# Altium PCB Music Box Shield.PcbDoc
Units mil, origin at the board's own origin, x right, y up, seen from the top; angles counter-clockwise.
Board outline 3050 x 2100 mil, 2 copper layers (Top Layer, Bottom Layer); 12 components, 9 nets, 60 pads, 1 vias.
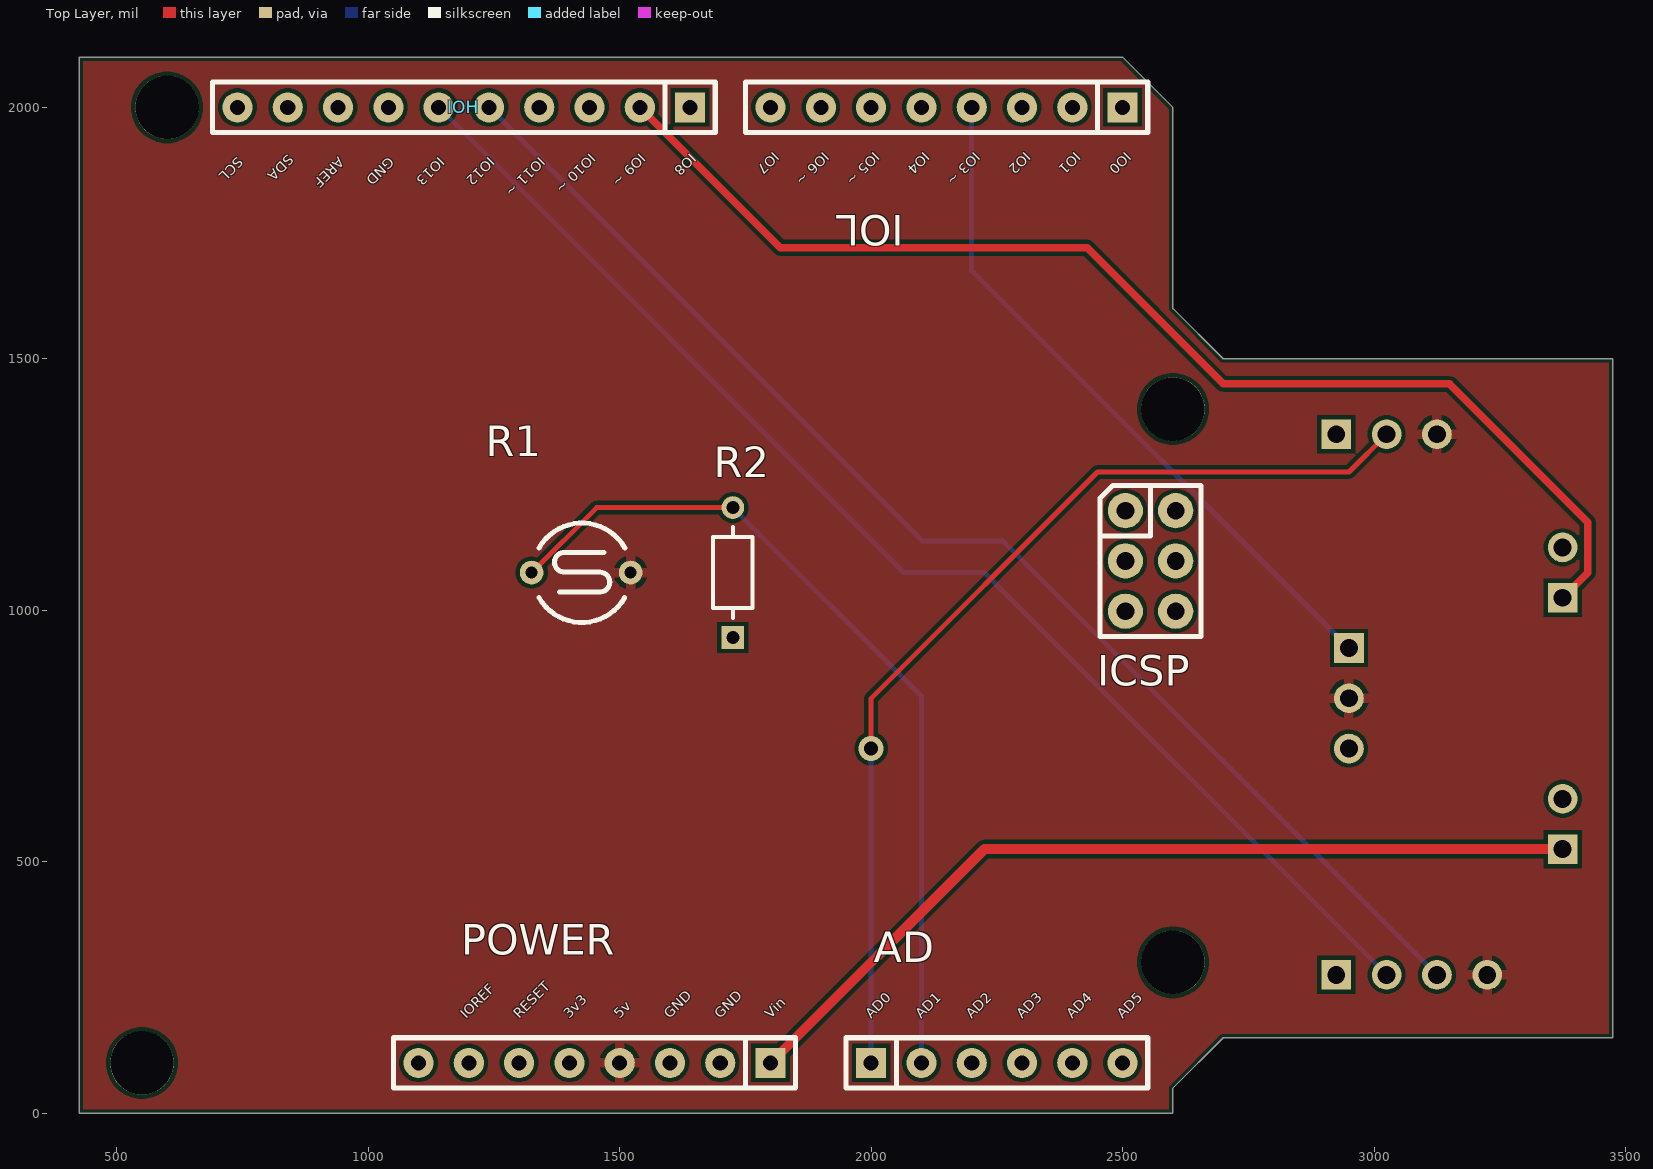
[diagram p0: Top Layer view]
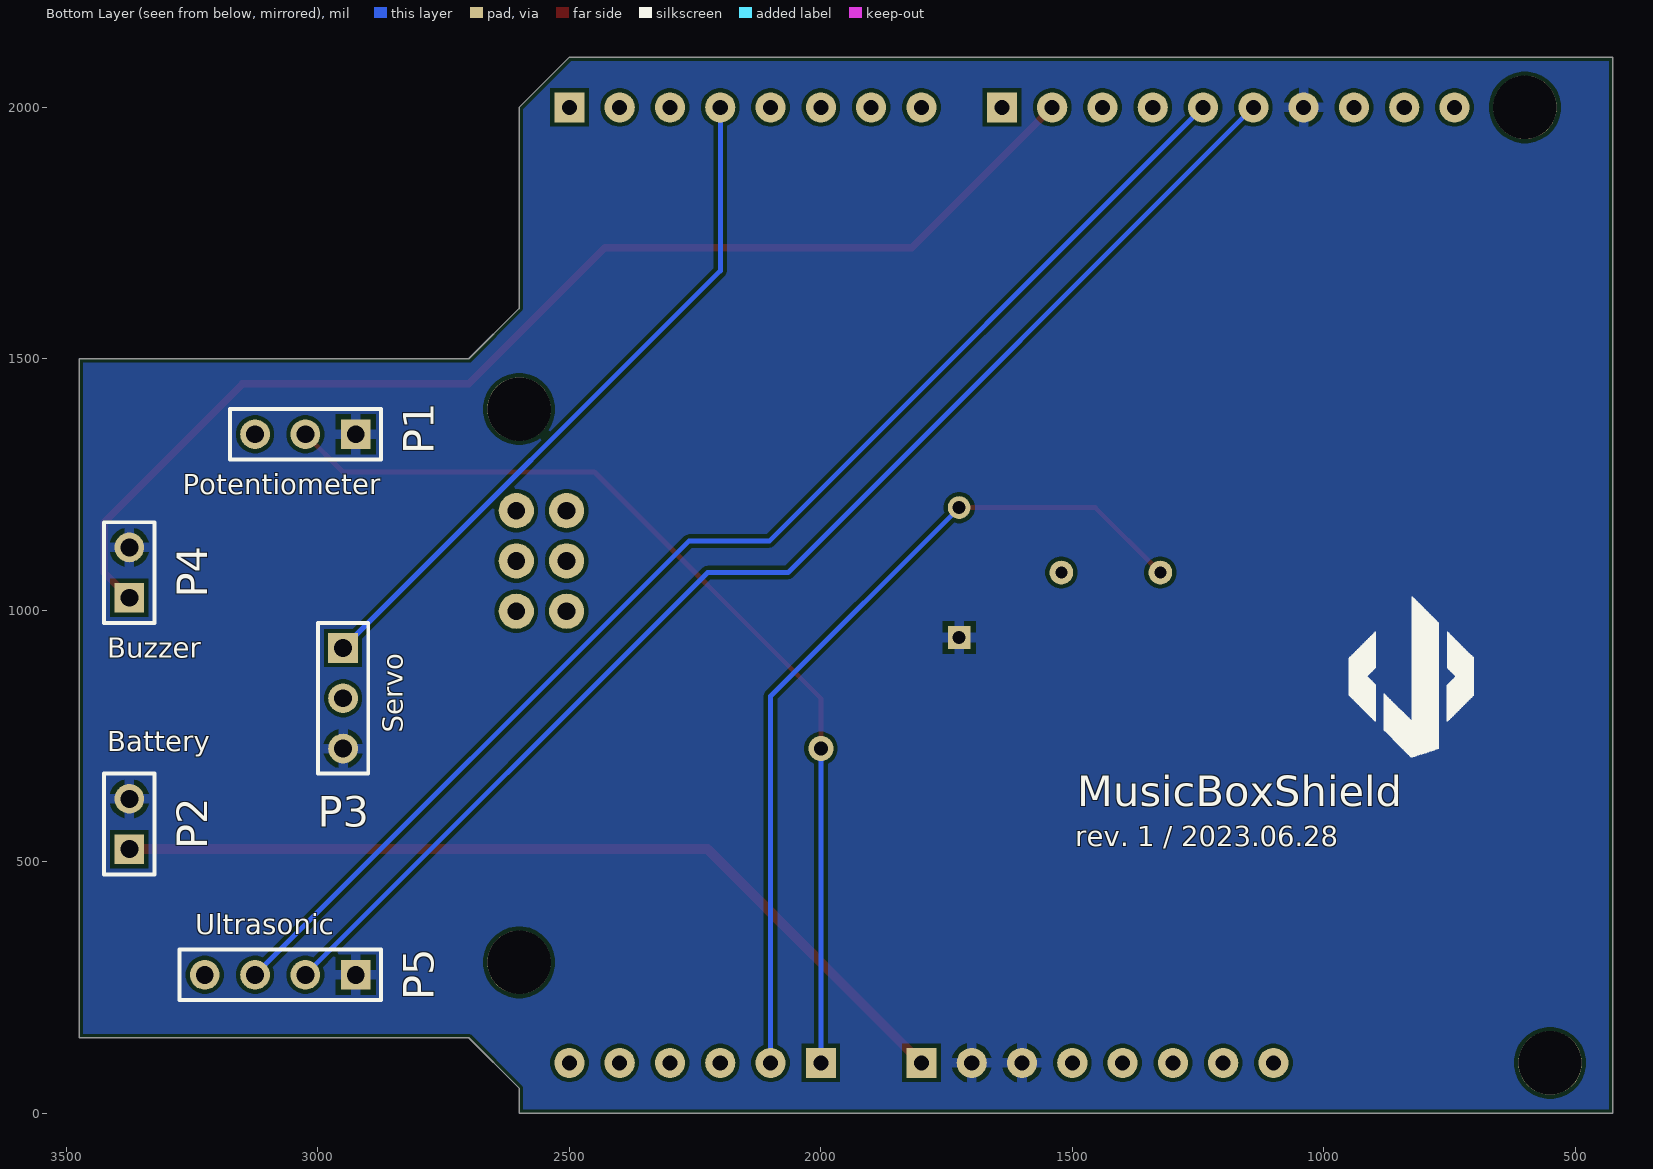
[diagram p1: Bottom Layer view, seen from below]
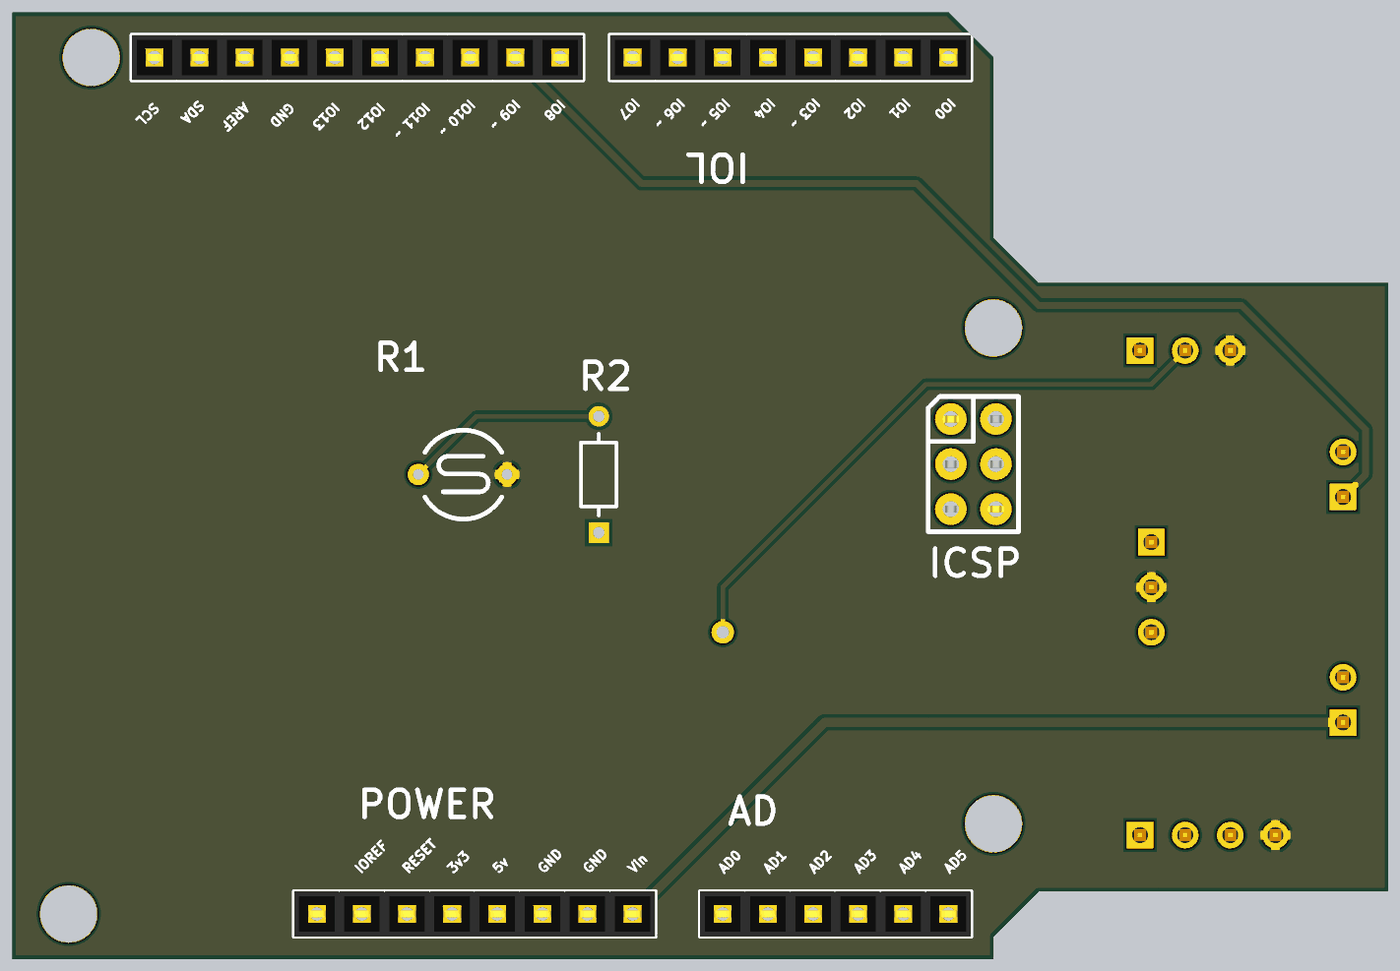
[diagram p2: 3D render of the assembled board from above, using the file's embedded part models]
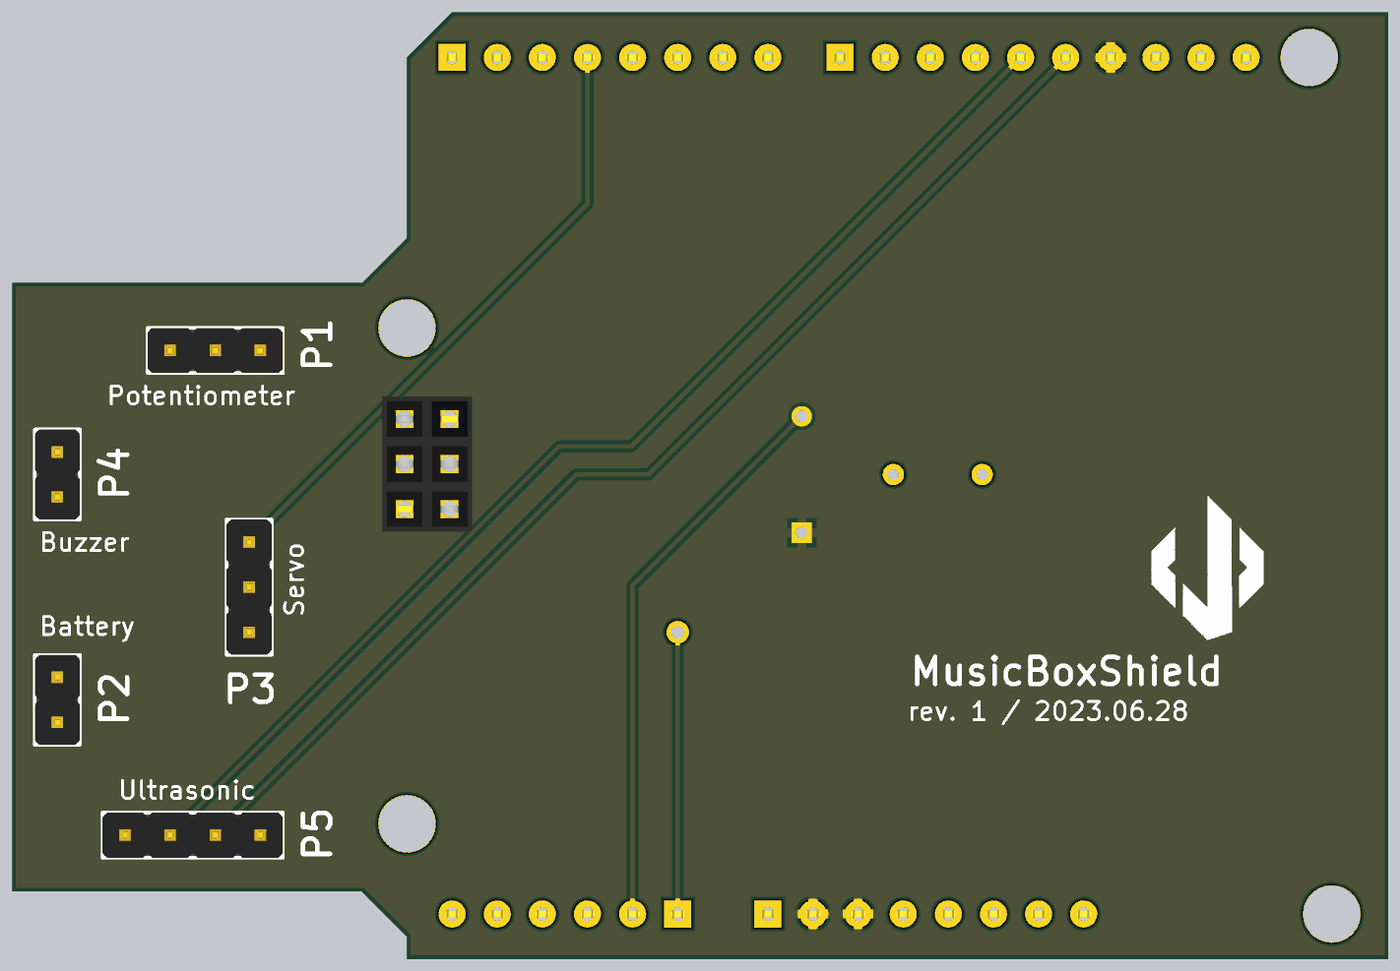
[diagram p3: 3D render of the assembled board from below, using the file's embedded part models]

## Layer stack, top to bottom
Top Solder: solder mask 0.4, Solder Resist, Dk 3.5
Top Layer: signal copper 1.4
Dielectric1: dielectric 12.6, FR-4, Dk 4.8
Bottom Layer: signal copper 1.4
Bottom Solder: solder mask 0.4, Solder Resist, Dk 3.5

## Board outline
2700,1500 3475,1500 3475,150 2700,150 2600,50 2600,0 425,0 425,2100 2500,2100 2600,2000 2600,1600

## Design rules (kind name [scope] priority, off if disabled: settings)
BoardOutlineClearance [All] p1: gap=7.87 ignorepadtopadclearanceinfootprint=FALSE except(15.75: Arc-SplitBarrior Arc-SplitContinuation Track-SplitBarrior Track-SplitContinuation SMDPad-SplitBarrior SMDPad-SplitContinuation THPad-SplitBarrior THPad-SplitContinuation Via-SplitBarrior Via-SplitContinuation Fill-SplitBarrior Fill-SplitContinuation Poly-SplitBarrior Poly-SplitContinuation Region-SplitBarrior Region-SplitContinuation Text-SplitBarrior Text-SplitContinuation)
Clearance "Clearance Bottom Layer" [OnLayer('Bottom Layer')] p1: gap=8 ignorepadtopadclearanceinfootprint=TRUE except(10: Arc-Text Track-Text SMDPad-Text THPad-Text Via-Text Fill-Text Poly-Text Region-Text Text-Text)
Clearance "Clearance Top Layer" [OnLayer('Top Layer')] p2: gap=8 ignorepadtopadclearanceinfootprint=TRUE except(10: Arc-Text Track-Text SMDPad-Text THPad-Text Via-Text Fill-Text Poly-Text Region-Text Text-Text)
Clearance [All] p3: gap=7.87 ignorepadtopadclearanceinfootprint=FALSE except(3.5: Arc-Arc Arc-Track Arc-SMDPad Track-Track Track-SMDPad SMDPad-SMDPad; 5: Arc-Via Track-Via SMDPad-Via THPad-Via Via-Via; 10: Arc-Text Track-Text SMDPad-Text THPad-Text Via-Text Fill-Text Poly-Text Region-Text Text-Text)
HoleSize [All] p1: absolutevalues=TRUE maxlimit=248.03 minlimit=7.87 maxpercent=80.000 minpercent=20.000
MinimumAnnularRing [All] p1: minimumring=3
MinimumSolderMaskSliver [All] p1: minsoldermaskwidth=3.94
PolygonConnect PolygonConnect_1 [All] p1: thpad.connectstyle=Relief thpad.reliefconductorwidth=20 thpad.reliefentries=4 thpad.polygonreliefangle="90 Angle" thpad.airgapwidth=10 smdpad.connectstyle=Relief smdpad.reliefconductorwidth=20 smdpad.reliefentries=4 smdpad.polygonreliefangle="90 Angle" smdpad.airgapwidth=10 via.connectstyle=Direct via.reliefconductorwidth=20 via.reliefentries=4 via.polygonreliefangle="90 Angle" via.airgapwidth=10
RoutingCorners [All] p1: cornerstyle=Round minsetback=100 maxsetback=100
RoutingVias [All] p1: holewidth=19.68 width=39.37 viastyle="Through Hole" minholewidth=7.87 minwidth=17.72 maxholewidth=39.37 maxwidth=78.74
SilkToSilkClearance [All] p1: silktosilkclearance=3.94
SilkToSolderMaskClearance [IsPad] p1: minsilkscreentomaskgap=3.94 clearancetoexposedcopper=TRUE
SolderMaskExpansion [All] p1: expansion=4 istentingtop=FALSE
Width [All] p1: maxlimit=100 minlimit=3.5 preferedwidth=15
25 further rules are at their usual default settings.

## Components (designator, comment, footprint, x,y, rotation, side; value= is the part's Value field where it differs from the comment)
AD "AD" "Header 6x1 8.5mm" 2000,100 r0 top locked
ICSP "ICSP" ICSP 2505.51,1198.03 r0 top locked
IOH "IOH" "Header 10x1 8.5mm" 1640,2000 r180 top locked
IOL "IOL" "Header 8x1 8.5mm" 2500,2000 r180 top locked
P1 "Potentiometer" HDR1X3 2925,1350 r0 bottom
P2 "9V Battery" HDR1X2 3375,525 r90 bottom
P3 "Servo" HDR1X3 2950,925 r270 bottom
P4 "Buzzer" HDR1X2 3375,1025 r90 bottom
P5 "HC-SR04" HDR1X4 2925,275 r0 bottom
POWER "POWER_UNO" "Header 8x1 8.5mm" 1800,100 r180 top locked
R1 "Photoresistor" "5MM PHOTORESISTOR" 1325,1075 r0 top
R2 "CF18JT2K20" FP-CF18-MFG 1725,1075 r90 top value=2.2kΩ

## Footprints (in the part's own frame and the unit in brackets; to place one, negate y for a bottom-side part, rotate by r counter-clockwise, add the part's x,y. Pads: shape width x height; smd on the part's side, far side on the other; paste and mask are expansions set on the pad)
"5MM PHOTORESISTOR" [mm]
  round 1.2 hole 0.6: 1(0,0) 2(5,0)
  silkscreen extent 0.37,-2.52 4.71,2.5, body extent 0.23,-1.89 4.78,1.91, height 4.1
FP-CF18-MFG [mm]
  rect 1.15x1.15 hole 0.65 paste-1000 mask+0: 1(-3.28,0)
  round 1.15 hole 0.65 paste-1000 mask+0: 2(3.28,0)
  silkscreen extent -2.3,-1 2.3,1
HDR1X2 [mm] "Connector; Header; 2 Position"
  rect 1.5x1.5 hole 0.9: 1(0,0)
  round 1.5 hole 0.9: 2(2.54,0)
  silkscreen extent -1.27,-1.27 3.81,1.27, body extent -1.27,-1.27 3.81,1.27, height 8.89
HDR1X3 [mm] "Connector; Header; 3 Position"
  rect 1.5x1.5 hole 0.9: 1(0,0)
  round 1.5 hole 0.9: 2(2.54,0) 3(5.08,0)
  silkscreen extent -1.27,-1.27 6.35,1.27, body extent -1.27,-1.27 6.35,1.27, height 8.89
HDR1X4 [mm] "Connector; Header; 4 Position"
  rect 1.5x1.5 hole 0.9: 1(0,0)
  round 1.5 hole 0.9: 2(2.54,0) 3(5.08,0) 4(7.62,0)
  silkscreen extent -1.27,-1.27 8.89,1.27, body extent -1.27,-1.27 8.89,1.27, height 8.89
"Header 6x1 8.5mm" [mil] "Stackable 6 pin header"
  rect 60x60 hole 30: 1(0,0)
  round 60 hole 30: 2(100,0) 3(200,0) 4(300,0) 5(400,0) 6(500,0)
  silkscreen extent -50,-50 550,50, body extent -50,-50 550,50, height 335
"Header 8x1 8.5mm" [mil] "Stackable 8 pin header"
  rect 60x60 hole 30: 1(0,0)
  round 60 hole 30: 2(100,0) 3(200,0) 4(300,0) 5(400,0) 6(500,0) 7(600,0) 8(700,0)
  silkscreen extent -50,-50 750,50, body extent -50,-50 750,50, height 335
"Header 10x1 8.5mm" [mil] "Stackable 10 pin header"
  rect 60x60 hole 30: 1(0,0)
  round 60 hole 30: 2(100,0) 3(200,0) 4(300,0) 5(400,0) 6(500,0) 7(600,0) 8(700,0) 9(800,0) 10(900,0)
  silkscreen extent -50,-50 950,50, body extent -50,-50 950,50, height 335
ICSP [mil]
  round 70 hole 35.43: 1(0,0) 2(100,0) 3(0,-100) 4(100,-100) 5(0,-200) 6(100,-200)
  silkscreen extent -50,-250 150,50, body extent -50,-250 150,50, height 485

## Part data
P1 P3: library part CMP-083-000090-3, "Header, 3-Pin", Component Type=Standard, Design Item ID="Header 3", LatestRevisionDate=17-Jul-2002, LatestRevisionNote="Re-released for DXP Platform.", Pin Count=3, Publisher="Altium Limited", Source="Miscellaneous Connectors.SchLib"
P2 P4: library part CMP-083-000070-3, "Header, 2-Pin", Component Type=Standard, Design Item ID="Header 2", LatestRevisionDate=17-Jul-2002, LatestRevisionNote="Re-released for DXP Platform.", Pin Count=2, Publisher="Altium Limited", Source="Miscellaneous Connectors.SchLib"
P5: library part CMP-083-000097-3, "Header, 4-Pin", Component Type=Standard, Design Item ID="Header 4", LatestRevisionDate=17-Jul-2002, LatestRevisionNote="Re-released for DXP Platform.", Pin Count=4, Publisher="Altium Limited", Source="Miscellaneous Connectors.SchLib"
R1: "No Description Available"
R2: library part CMP-26528-000001-1, "RES 2.2K OHM 1/8W 5% CF AXIAL", Manufacturer="Stackpole Electronics Inc", Package=CF18, Power Rating=0.125W, Resistance=2.2kΩ, Temperature="-55°C to +155°C", Temperature Coefficient=0/-400ppm/°C, Temperature Range High=+155°C, Temperature Range Low=-55°C, Tolerance=5%, Voltage Rating=250V, Automotive=No, Category=Res, ComponentLink2Description=Datasheet, ComponentLink2URL=https://www.seielect.com/catalog/sei-cf_cfm.pdf, Composition="Carbon Film", Device Class L1="Passive Components", Device Class L2=Resistors, Device Class L3="Through-Hole Resistors", Digikey Description="RES 2.2K OHM 1/8W 5% CF AXIAL", Height=2mm, Ipc Land Pattern Name=RESAD656W65L360D200, Lead Free=Yes, Manufacturer Part Number=CF18JT2K20, Octopart=https://octopart.com/cf18jt2k20-stackpole+electronics-19205714, RoHS=TRUE, Series=CF

## Free pads (board coordinates)
  round 125.98 hole 125.98: 0(550,100) 0(600,2000) 0(2600,300) 0(2600,1400)

## Via types
v1: diameter 50, hole 28, Top Layer to Bottom Layer, 1 vias

## Nets (pads, with @x,y where several pads share a name; then routed paths per layer and width w, separated by ;. In a path a pad name is that pad's centre, name@x,y a point inside that pad or via, vN(x,y) a via of type N, cw(c..) or ccw(c..) an arc to the next point about the centre after c; other vN are vias at no path point)
+5: P1.3 P3.2 P5.4 POWER.4 R1.2
BUZZER: IOH.2 P4.1 | length 2397.4
  Top Layer w15: IOH.2 1819.31,1720.69 2429.31,1720.69 2700,1450 3150,1450 3425,1175 3425,1075 P4.1
GND: IOH.7 P1.1 P2.2 P3.3 P4.2 P5.1 POWER.2 POWER.3 R2.1
SERVO_PWM: IOL.4 P3.1 | length 1385.7
  Bottom Layer w10: IOL.4 2200,1675 P3.1
US_ECHO: IOH.6 P5.2 | length 2599.5
  Bottom Layer w10: IOH.6 2065,1075 2225,1075 P5.2
US_TRIG: IOH.5 P5.3 | length 2599.5
  Bottom Layer w10: IOH.5 2102.59,1137.41 2262.59,1137.41 P5.3
V_LDR: AD.2 R1.1 R2.2 | length 1713
  Top Layer w10: R1.1 1454.13,1204.13 R2.2
  Bottom Layer w10: R2.2 2100,829.13 AD.2
V_POT: AD.1 P1.2 | length 1967.5
  Top Layer w10: v1(2000,725) 2000,825 2450,1275 2950,1275 P1.2
  Bottom Layer w10: AD.1 v1(2000,725)
VIN: P2.1 POWER.1 | length 1751
  Top Layer w20: POWER.1 2225,525 P2.1
pads on no net: AD.3 AD.4 AD.5 AD.6 ICSP.1 ICSP.2 ICSP.3 ICSP.4 ICSP.5 ICSP.6 IOH.1 IOH.3 IOH.4 IOH.8 IOH.9 IOH.10 IOL.1 IOL.2 IOL.3 IOL.5 IOL.6 IOL.7 IOL.8 POWER.5 POWER.6 POWER.7 POWER.8

## Polygon pours and split planes (outlines as drawn)
+5 on Top Layer "5V" (solid, pour order 1): 2700,1500 3475,1500 3475,150 2700,150 2600,50 2600,0 425,0 425,2100 2500,2100 2600,2000 2600,1600
GND on Bottom Layer "GND" (solid, pour order 0): 2700,1500 3475,1500 3475,150 2700,150 2600,50 2600,0 0,0 0,2100 2500,2100 2600,2000 2600,1600

## Silkscreen, mask and mechanical layers (free items; w line width, h text height)
Top Overlay:
  text "IO7" at 1805,1912.93 h20 r225
  text "IO6 ~" at 1905,1912.93 h20 r225
  text "IO5 ~" at 2005,1912.93 h20 r225
  text "IO4" at 2105,1912.93 h20 r225
  text "IO3 ~" at 2205,1912.93 h20 r225
  text "IO2" at 2305,1912.93 h20 r225
  text "IO1" at 2405,1912.93 h20 r225
  text "IO0" at 2505,1912.93 h20 r225
  text "IO10 ~" at 1440,1910 h20 r225
  text "IO9 ~" at 1540,1910 h20 r225
  text "IO8" at 1640,1910 h20 r225
  text "SDA" at 840,1907.93 h20 r225
  text "SCL" at 740,1902.93 h20 r225
  text "AREF" at 940,1902.93 h20 r225
  text "GND" at 1040,1902.93 h20 r225
  text "IO13" at 1140,1902.93 h20 r225
  text "IO12" at 1240,1902.93 h20 r225
  text "IO11 ~" at 1340,1902.93 h20 r225
  text "IOREF" at 1195,187.07 h20 r45
  text "RESET" at 1300,187.07 h20 r45
  text "3v3" at 1400,187.07 h20 r45
  text "5v" at 1500,187.07 h20 r45
  text "GND" at 1600,187.07 h20 r45
  text "GND" at 1700,187.07 h20 r45
  text "Vin" at 1800,187.07 h20 r45
  text "AD0" at 2000,187.07 h20 r45
  text "AD1" at 2100,187.07 h20 r45
  text "AD2" at 2200,187.07 h20 r45
  text "AD3" at 2300,187.07 h20 r45
  text "AD4" at 2400,187.07 h20 r45
  text "AD5" at 2500,187.07 h20 r45
  text "RESET" at 1295,-2515 h20 r45
  text "3v3" at 1395,-2515 h20 r45
  text "5v" at 1495,-2515 h20 r45
  text "GND" at 1595,-2515 h20 r45
  text "GND" at 1695,-2515 h20 r45
  text "Vin" at 1795,-2515 h20 r45
Bottom Overlay:
  drawing of 3 lines, arcs and shapes, not listed
  text "Potentiometer" at 3269,1231 h40
  text "Buzzer" at 3419,906 h40
  text "Servo" at 2831,756 h40 r270
  text "Battery" at 3419,719.33 h40
  text "MusicBoxShield" at 1490,610 h60
  text "rev. 1 / 2023.06.28" at 1494,531 h40
  text "Ultrasonic" at 3244,356 h40
Mechanical 1:
  circle w5: c2600,1400 r62.99
  circle w5: c550,100 r62.99
  circle w5: c2600,300 r62.99
  circle w5: c600,2000 r62.99
  lines w5: 0,0 0,2100 2500,2100 2600,2000 2600,1600 2700,1500 2700,150 2600,50 2600,0 0,0